# Altium PCB G502_motherboard_altiumdesigner_v1.1.pcbdoc
Units mm, origin at the board's own origin, x right, y up, seen from the top; angles counter-clockwise.
Board outline 103.58 x 126.25 mm, 2 copper layers (Top Layer, Bottom Layer); 55 components, 14 nets, 42 pads, 118 vias.
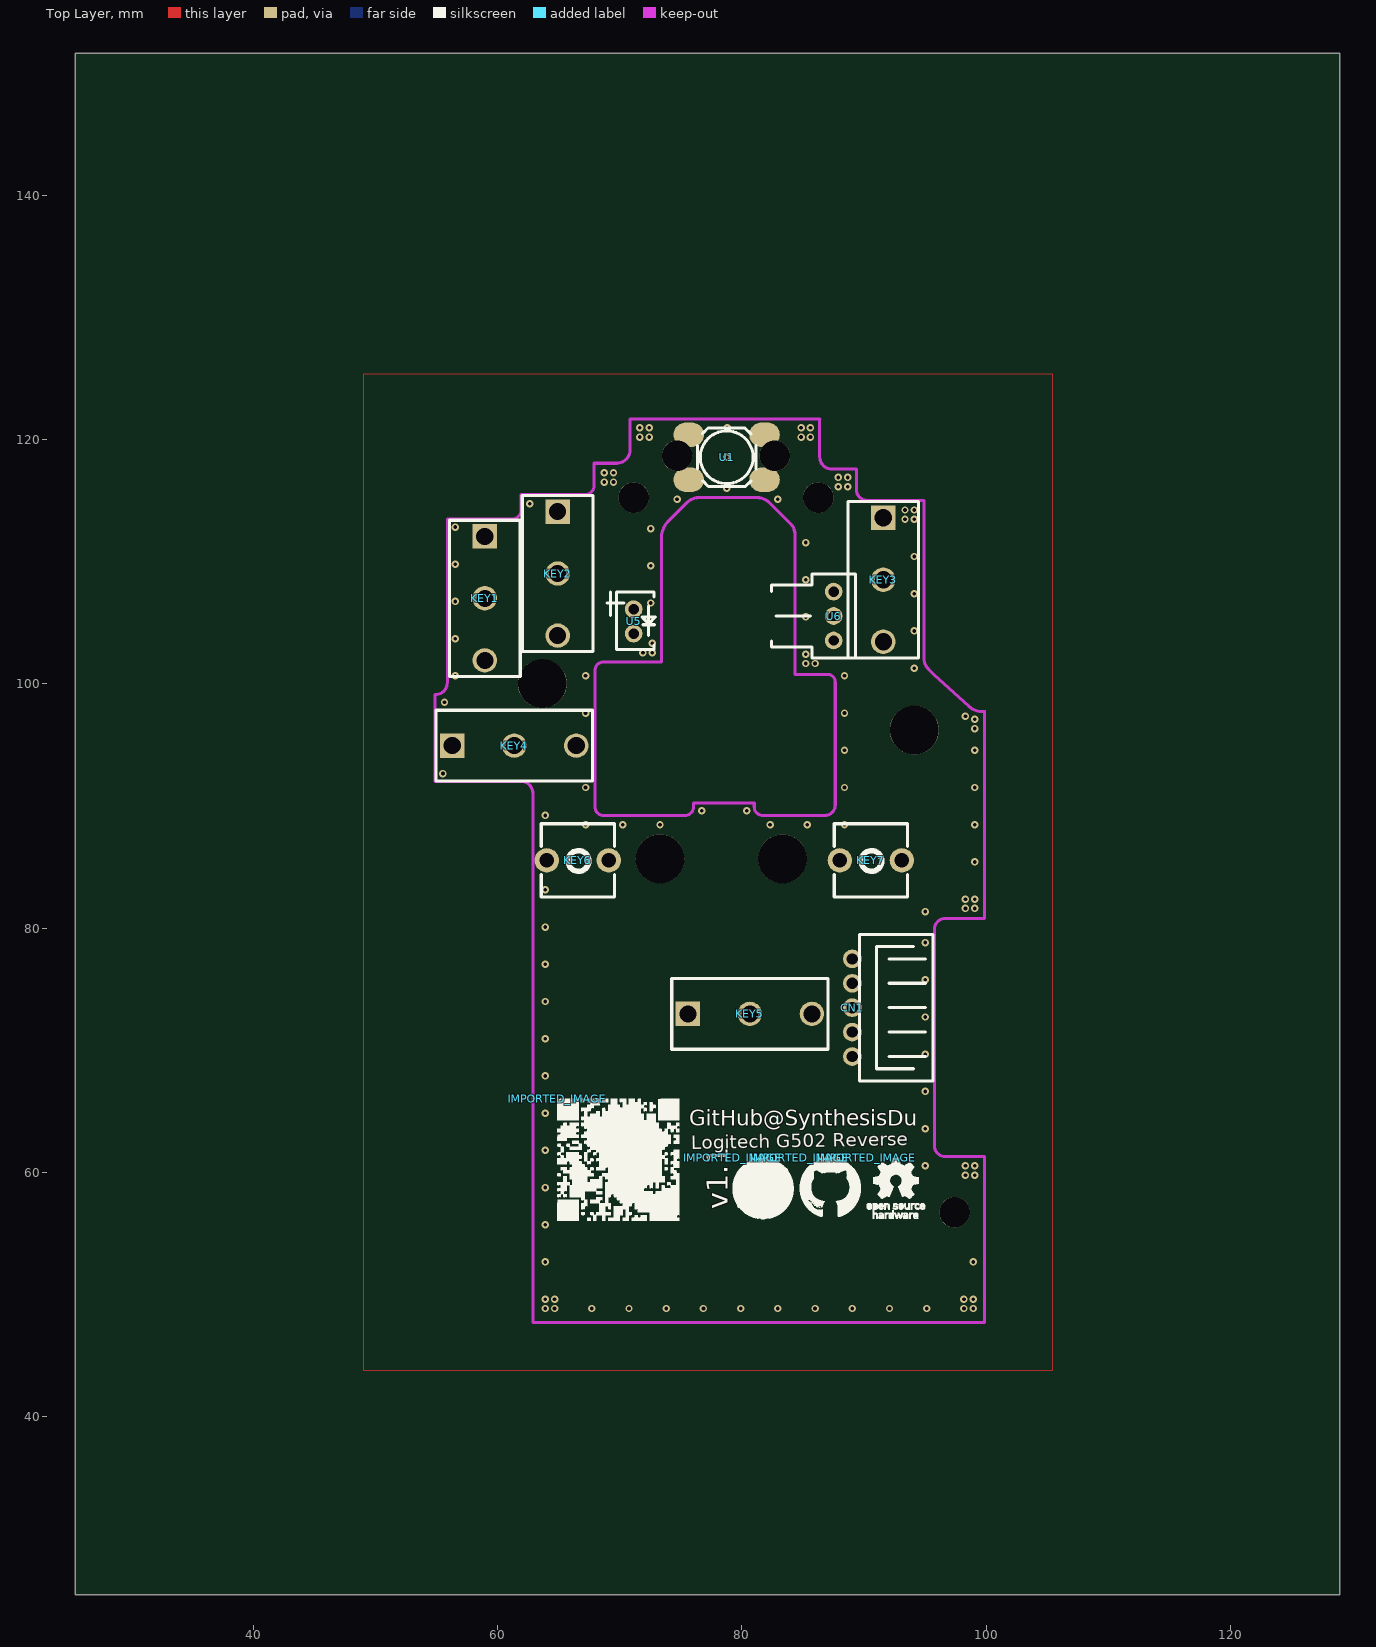
[diagram p0: Top Layer view]
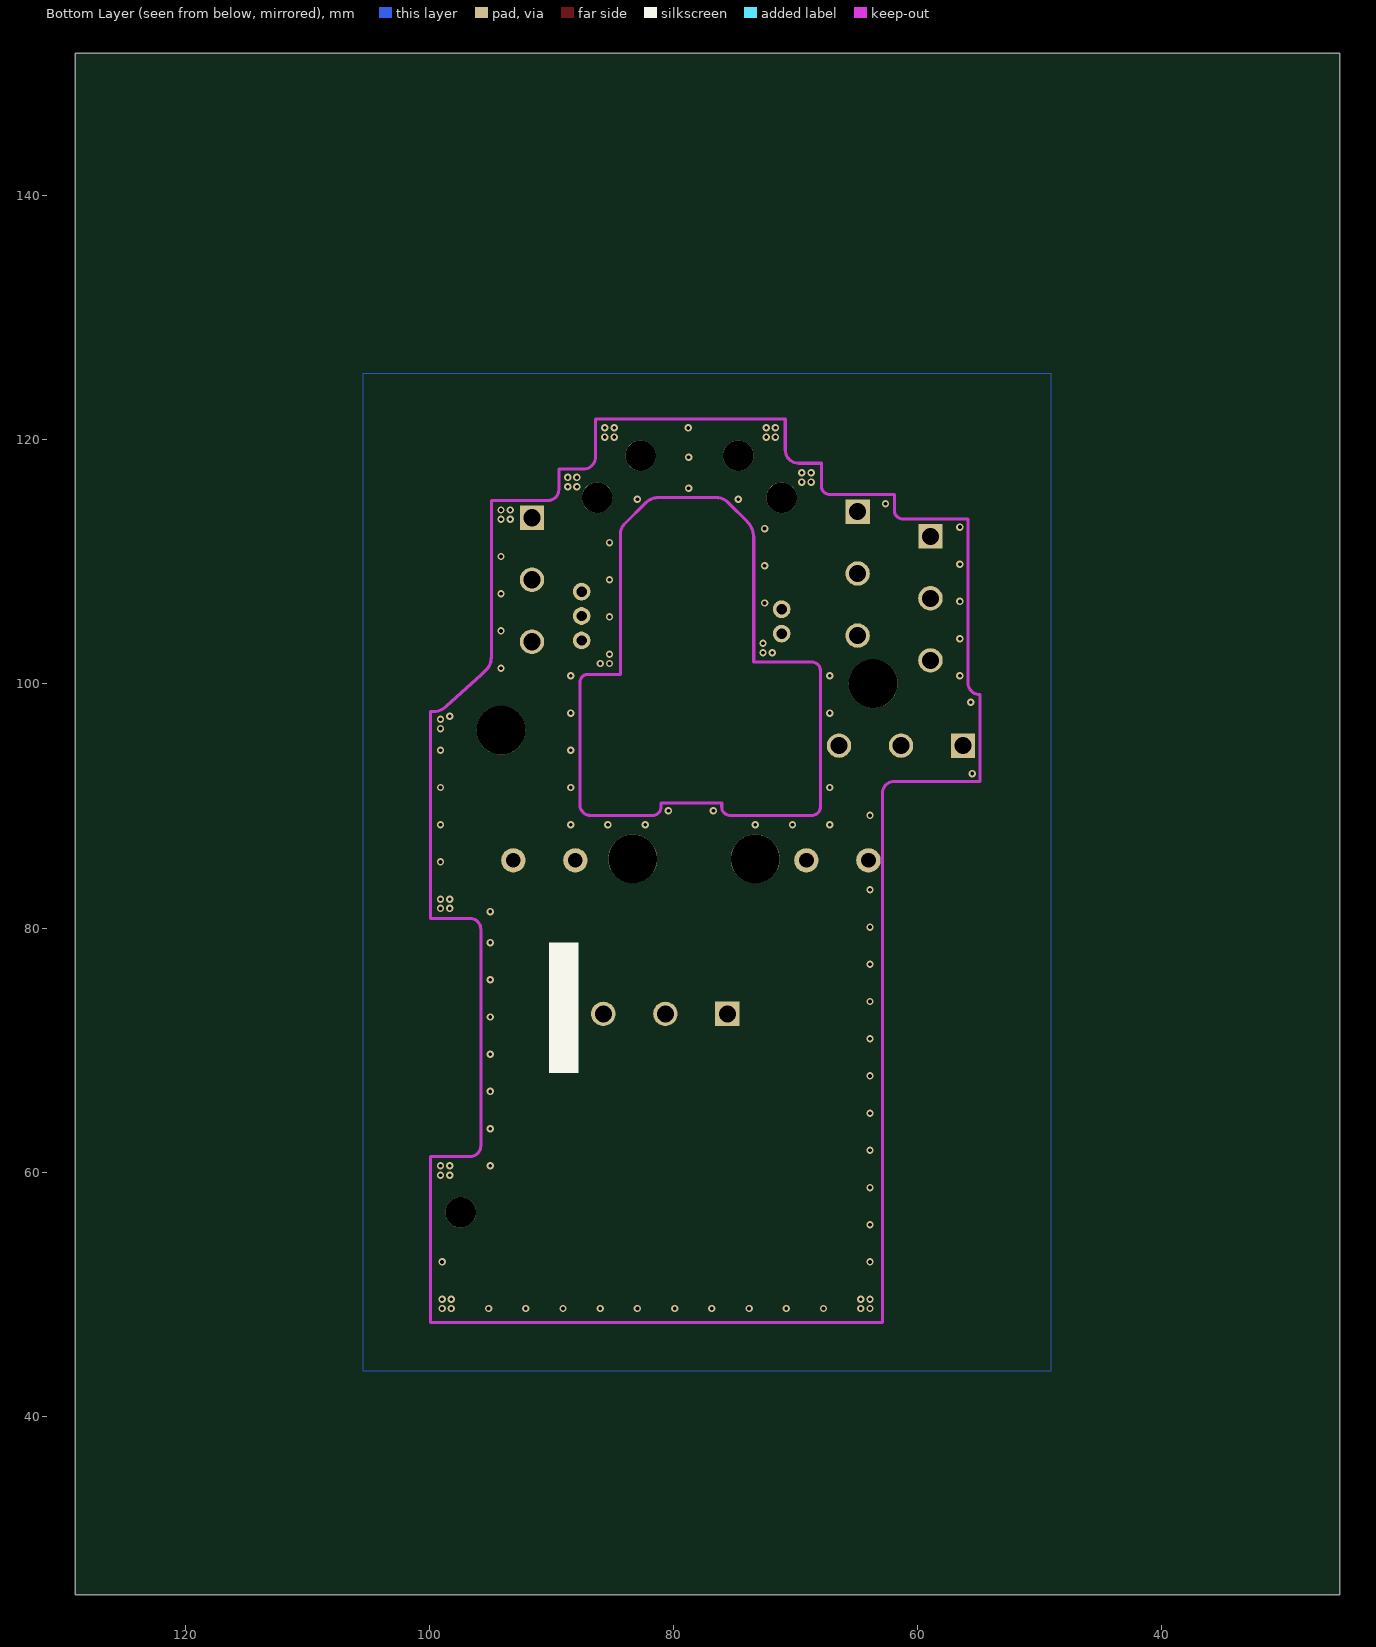
[diagram p1: Bottom Layer view, seen from below]

## Layer stack, top to bottom
Top Layer: signal copper (thickness not stored)
Dielectric: dielectric 0.32, FR-4, Dk 4.8
Bottom Layer: signal copper (thickness not stored)

## Board outline
128.985,25.4 25.4,25.4 25.4,151.651 128.985,151.651

## Components (designator, comment, footprint, x,y, rotation, side; value= is the part's Value field where it differs from the comment)
CN1 "CONN-TH_PH-5AW" CONN-TH_PH-5AW 89.039,73.48 r90 top
IMPORTED_IMAGE "IMPORTED_IMAGE" IMPORTED_IMAGE 64.883,66.01 r0 top
IMPORTED_IMAGE "IMPORTED_IMAGE" IMPORTED_IMAGE 79.241,61.17 r0 top
IMPORTED_IMAGE "IMPORTED_IMAGE" IMPORTED_IMAGE 84.742,61.19 r0 top
IMPORTED_IMAGE "IMPORTED_IMAGE" IMPORTED_IMAGE 90.228,61.173 r0 top
KEY1 "SW-TH_D2F-F" SW-TH_D2F-F 58.94,107.008 r270 top
KEY2 "SW-TH_D2F-F" SW-TH_D2F-F 64.909,109.04 r270 top
KEY3 "SW-TH_D2F-F" SW-TH_D2F-F 91.579,108.532 r270 top
KEY4 "SW-TH_D2F-F" SW-TH_D2F-F 61.353,94.943 r0 top
KEY5 "SW-TH_D2F-F" SW-TH_D2F-F 80.656,72.973 r0 top
KEY6 "KEY-TH_2P-L6.0-W6.0-P5.00" KEY-TH_2P-L6.0-W6.0-P5.00 66.56,85.545 r0 top
KEY7 "KEY-TH_2P-L6.0-W6.0-P5.00" KEY-TH_2P-L6.0-W6.0-P5.00 90.563,85.545 r0 top
U1 "SW-SMD_4P-L4.8-W4.8-P3.70-LS6.4" SW-SMD_4P-L4.8-W4.8-P3.70-LS6.4 78.752,118.565 r0 top
U5 "罗技LOGITECH 光栅 激光发射" "罗技LOGITECH 光栅 激光发射" 71.513,105.611 r90 top
U6 "罗技LOGITECH 光栅 激光接收器" "罗技LOGITECH 光栅 激光接收器" 88.15,104.037 r90 top
? "" ? 62.877,124.34 r0 top
? "" ? 52.048,119.863 r0 top
? "" ? 93.084,124.322 r0 top
? "" ? 105.023,119.613 r0 top
? "" ? 87.872,118.06 r0 top
? "" ? 108.034,116.3 r0 top
? "" ? 92.17,117.958 r0 top
? "" ? 48.499,106.362 r0 top
? "" ? 59.393,114.518 r0 top
? "" ? 58.86,118.043 r0 top
? "" ? 64.956,118.043 r0 top
? "" ? 52.186,116.807 r0 top
? "" ? 69.378,120.795 r0 top
? "" ? 104.143,108.259 r0 top
? "" ? 59.126,47.177 r0 top
? "" ? 46.514,95.771 r0 top
? "" ? 51.352,102.735 r0 top
? "" ? 81.419,44.381 r0 top
? "" ? 58.877,88.395 r0 top
? "" ? 77.376,94.681 r0 top
? "" ? 97.835,61.449 r0 top
? "" ? 105.694,71.038 r0 top
? "" ? 102.988,54.449 r0 top
? "" ? 64.643,117.172 r0 top
? "" ? 89.631,114.512 r0 top
? "" ? 83.963,118.49 r0 top
? "" ? 70.632,114.012 r0 top
? "" ? 74.668,117.691 r0 top
? "" ? 71.264,95.478 r0 top
? "" ? 88.715,94.977 r0 top
? "" ? 61.626,115.461 r0 top
? "" ? 93.712,109.849 r0 top
? "" ? 66.104,102.263 r0 top
? "" ? 71.978,89.728 r0 top
? "" ? 78.539,84.689 r0 top
? "" ? 84.265,91.976 r0 top
? "" ? 89.665,97.289 r0 top
? "" ? 67.338,95.239 r0 top
? "" ? 85.02,58.863 r0 top
? "" ? 87.811,61.826 r0 top

## Footprints (in the part's own frame and the unit in brackets; to place one, negate y for a bottom-side part, rotate by r counter-clockwise, add the part's x,y. Pads: shape width x height; smd on the part's side, far side on the other; paste and mask are expansions set on the pad)
CONN-TH_PH-5AW [mil]
  round 60 hole 36: 1(157.5,0) 2(78.7,0) 3(0,0) 4(-78.8,0) 5(-157.5,0)
  silkscreen extent -236,-260 236,-24
IMPORTED_IMAGE [mm]
  silkscreen extent 0,-10 10,0
KEY-TH_2P-L6.0-W6.0-P5.00 [mm]
  round 2 hole 1.2: 1(-2.54,0) 2(2.54,0)
  silkscreen extent -3,-3 3,3
SW-SMD_4P-L4.8-W4.8-P3.70-LS6.4 [mm]
  oval 2.5x2 smd: 1(-3.1,-1.85) 2(-3.1,1.85) 3(3.1,-1.85) 4(3.1,1.85)
  silkscreen extent -2.4,-2.4 2.4,2.4
SW-TH_D2F-F [mm]
  rect 2x2 hole 1.4: 1(-5.079,-0.001)
  round 2 hole 1.4: 2(-0.001,0.001) 3(5.079,0.001)
  silkscreen extent -6.4,-2.9 6.4,2.9
"罗技LOGITECH 光栅 激光发射" [mm]
  round 1.45 hole 0.85: 1(-1.494,0.381) 2(0.508,0.381)
  silkscreen extent -2.79,-1.4 1.91,2.54
"罗技LOGITECH 光栅 激光接收器" [mm]
  round 1.45 hole 0.85: 2(-0.477,0.635) 2(1.524,0.635) 2(3.526,0.635)
  silkscreen extent -1.91,-1.14 4.95,5.71
? [mm]

## Free pads (board coordinates)
  round 4 hole 4 unplated: ""(63.639,100.023) ""(73.291,85.672) ""(83.324,85.672) ""(94.119,96.213)
  round 2.5 hole 2.5 unplated: ""(71.132,115.263) ""(74.688,118.692) ""(82.689,118.692) ""(86.245,115.263) ""(97.421,56.716)

## Via types
v1: diameter 0.61, hole 0.305, Top Layer to Bottom Layer, tented both sides, 118 vias

## Nets (pads, with @x,y where several pads share a name; then routed paths per layer and width w, separated by ;. In a path a pad name is that pad's centre, name@x,y a point inside that pad or via, vN(x,y) a via of type N, cw(c..) or ccw(c..) an arc to the next point about the centre after c; other vN are vias at no path point)
GND: CN1.1 CN1.2 CN1.3 CN1.4 CN1.5 KEY1.1 KEY1.2 KEY1.3 KEY2.1 KEY2.2 KEY2.3 KEY3.1 KEY3.2 KEY3.3 KEY4.1 KEY4.2 KEY4.3 KEY5.1 KEY5.2 KEY5.3 KEY6.1 KEY6.2 KEY7.1 KEY7.2 U5.1 U5.2 U6.2
  other v1: 63.893,48.842 64.655,48.842 67.703,48.842 70.751,48.842 73.799,48.842 76.847,48.842 79.895,48.842 82.943,48.842 85.991,48.842 89.039,48.842 92.087,48.842 95.135,48.842 98.183,48.842 98.945,48.842 63.893,49.604 64.655,49.604 98.183,49.604 98.945,49.604 63.893,52.652 98.945,52.652 63.893,55.7 63.893,58.748 98.31,59.764 99.072,59.764 95.008,60.526 98.31,60.526 99.072,60.526 63.893,61.796 95.008,63.574 63.893,64.844 95.008,66.622 63.893,67.892 95.008,69.67 63.893,70.94 95.008,72.718 63.893,73.988 95.008,75.766 63.893,77.036 95.008,78.814 63.893,80.084 95.008,81.354 98.31,81.608 99.072,81.608 98.31,82.37 99.072,82.37 63.893,83.132 99.072,85.418 67.195,88.466 70.243,88.466 73.291,88.466 82.308,88.466 85.356,88.466 88.404,88.466 99.072,88.466 63.893,89.228 76.72,89.609 80.403,89.609 67.195,91.514 88.404,91.514 99.072,91.514 55.511,92.657 88.404,94.562 99.072,94.562 99.072,96.34 99.072,97.102 98.31,97.356 67.195,97.61 88.404,97.61 55.638,98.499 56.527,100.658 67.195,100.658 88.404,100.658 94.119,101.293 85.229,101.674 85.991,101.674 85.229,102.436 71.894,102.563 72.656,102.563 72.656,103.325 56.527,103.706 94.119,104.341 85.229,105.484 72.529,106.627 56.527,106.754 94.119,107.389 85.229,108.532 72.529,109.675 56.527,109.802 94.119,110.437 85.229,111.58 72.529,112.723 56.527,112.85 93.357,113.485 94.119,113.485 93.357,114.247 94.119,114.247 62.623,114.755 74.688,115.136 82.943,115.136 78.752,116.025 87.896,116.152 88.658,116.152 68.719,116.533 69.481,116.533 87.896,116.914 88.658,116.914 68.719,117.295 69.481,117.295 78.752,118.565 71.64,120.216 72.402,120.216 84.848,120.216 85.61,120.216 78.782,120.965 71.64,120.978 72.402,120.978 84.848,120.978 85.61,120.978
S$38: 
S$66: 
S$139: 
S$260: 
S$288: 
S$340: 
S$359: 
S$467: 
S$516: 
S$529: 
S$612: 
S$676: 
S$746: 
pads on no net: U1.1 U1.2 U1.3 U1.4

## Polygon pours and split planes (outlines as drawn)
GND on Bottom Layer (solid): 49.034,43.762 49.034,125.423 105.422,125.423 105.422,43.762
GND on Top Layer (solid): 49.034,43.762 49.034,125.423 105.422,125.423 105.422,43.762

## Keep-outs
Keep-Out Layer:
  lines w0.254 net S$139: 89.382,115.905 ccw(c90.251,115.905) 90.251,115.036
  lines w0.254 net S$359: 54.876,99.11 ccw(c54.876,100.103) 55.87,100.103
  lines w0.254 net S$38: 69.743,118.075 ccw(c69.743,119.169) 70.838,119.169
  lines w0.254 net S$467: 61.895,92.022 cw(c61.895,91.04) 62.877,91.04
  lines w0.254 net S$516: 95.77,62.161 ccw(c96.644,62.161) 96.644,61.287 ; 95.77,79.911 cw(c96.652,79.911) 96.652,80.792
  lines w0.254 net S$612: 94.913,102.108 ccw(c96.187,102.108) 95.286,101.207 ; 98.588,98.176 ccw(c99.659,99.247) 99.659,97.732 ; 99.873,97.737 cw(c99.873,97.732) 99.877,97.732
  lines w0.254 net S$66: 86.367,118.608 ccw(c87.388,118.608) 87.388,117.587
  lines w0.254 net S$676: 73.418,112.013 cw(c75.211,112.013) 73.943,113.281 ; 75.537,114.875 cw(c76.474,113.938) 76.474,115.263 ; 81.227,115.263 cw(c81.227,113.8) 82.262,114.834 ; 84.008,113.088 cw(c83.206,112.286) 84.34,112.286
  lines w0.254 net S$746: 61.208,113.51 ccw(c61.208,114.204) 61.902,114.204 ; 67.184,115.517 ccw(c67.184,116.211) 67.879,116.211 ; 67.957,89.938 ccw(c68.668,89.938) 68.668,89.228 ; 67.957,101.09 cw(c68.668,101.09) 68.668,101.801 ; 75.343,89.228 ccw(c75.343,89.922) 76.037,89.922 ; 81.008,89.922 ccw(c81.702,89.922) 81.702,89.228 ; 86.802,89.228 ccw(c86.802,90.069) 87.642,90.069 ; 87.007,100.785 cw(c87.007,100.15) 87.642,100.15

## Silkscreen, mask and mechanical layers (free items; w line width, h text height)
Top Overlay:
  text "GitHub@SynthesisDu" at 75.704,63.813 h1.3
  text "Logitech G502 Reverse" at 75.841,61.881 h1.1 r1
  text "v1.1" at 78.84,56.97 h1.7 r90
Bottom Overlay:
  rectangle: 87.769,68.146 90.182,78.814